# EAGLE board Super Crift-Leelo (1) (EAGLE 7.6.0)

Size 56.82 x 53.33 mm. Coordinates in mm from the lower left corner, seen from the top.
Outline: 0,0 56.82,0 56.82,53.33 0,53.33 0,0
Copper layers (1*16): Top 0.035mm / dielectric 1.5mm / Bottom 0.035mm
Design rules "default": minimum track width 10mil, minimum drill 24mil, track to track 8mil, track to pad 8mil, pad to pad 8mil, via to via 8mil, smd to smd 8mil, copper to edge 40mil, drill to drill 8mil, minimum pad ring 10mil, minimum via ring 8mil, stop-mask expansion 4mil, vias tented up to drill 0mil, thermal gap 10mil

## Footprints (pad centres in the part's own frame; a part is rotated, then mirrored left to right if it is on the bottom)
DC-POWER = drill 0.889 pad 2.54 octagon: + 0,2.54; - 0,-2.54
B25V = drill 0.813 long: A 2.54,0.635; E -2.54,0.635; S 0,0.635
0207/10 = drill 0.813 octagon: 1 -5.08,0; 2 5.08,0

## Placement (x,y rotation side)
Meter1  [DC-POWER]  5,73.58 0 top  (outside the outline)
Rpot1  30k‎Ω  [B25V]  5,60.88 0 top  (outside the outline)
Rr1  470‎Ω  [0207/10]  5,10.08 0 top
Rr2  10k‎Ω  [0207/10]  5,22.78 0 top
Rr3  22k‎Ω  [0207/10]  5,35.48 0 top
Rr4  1k‎Ω  [0207/10]  5,48.18 0 top

## Library data of the parts
Meter1 Rpot1 Rr1-Rr4 = AUTODESK_CIRCUITS_BREADBOARD

## Nets
N$1: Rpot1.A Rr1.2 Rr2.1 Rr3.1
N$2: Meter1.+ Rr1.1
N$3: Rpot1.E Rr2.2 Rr3.2 Rr4.1
N$4: Meter1.- Rr4.2

## Tracks (layer width: path | path; a pad name or v marks a point on that pad's centre or on a via)
N$1  (3 unrouted)
N$2  (1 unrouted)
N$3  (3 unrouted)
N$4  (1 unrouted)